# EAGLE board NU32 (EAGLE 5.12)
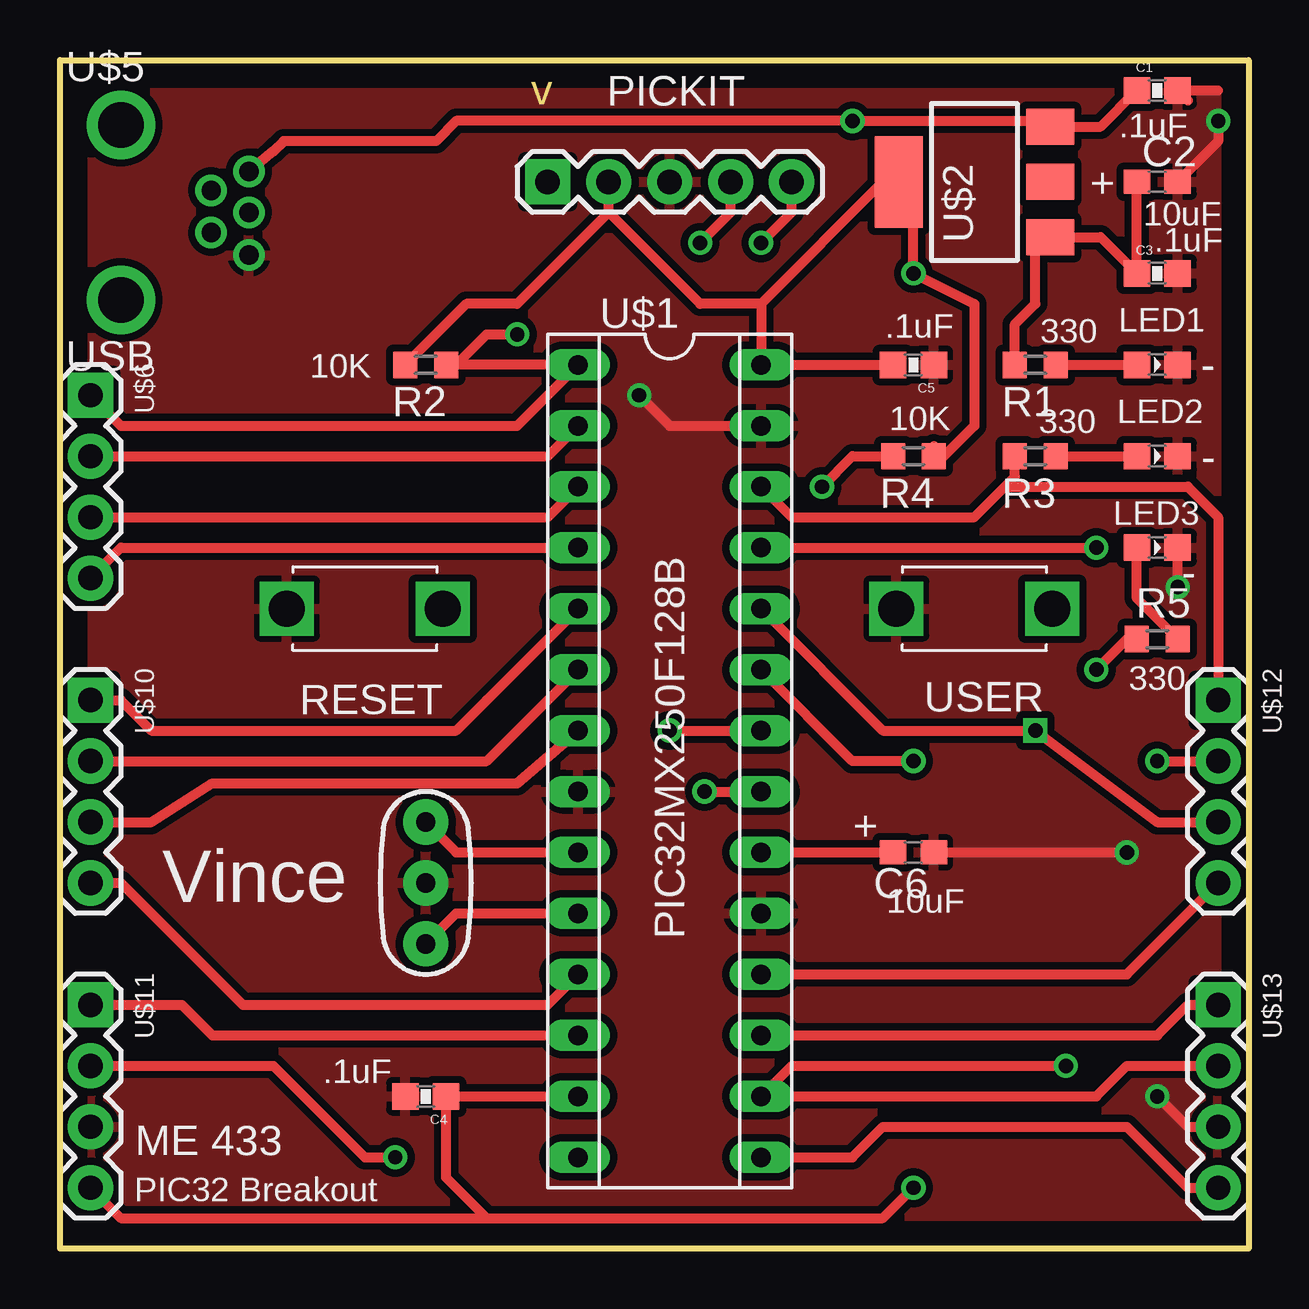
[diagram p0: board, top side]
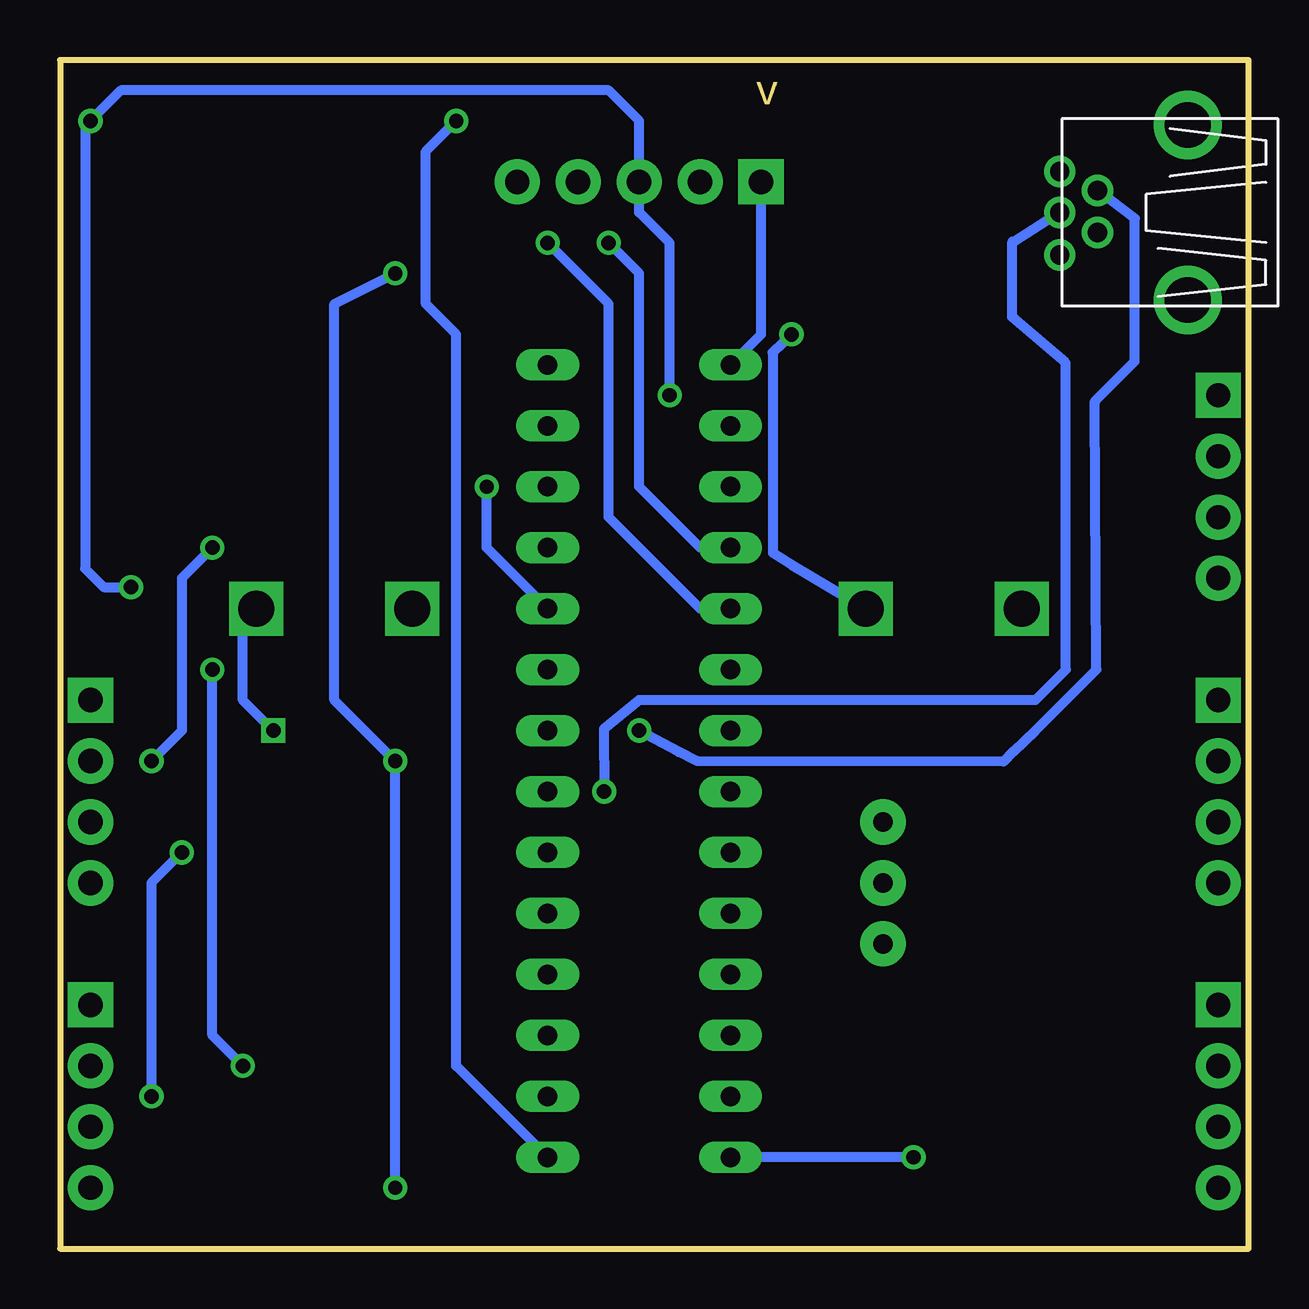
[diagram p1: board, bottom side, seen from below]

Size 49.53 x 49.53 mm. Coordinates in mm from the lower left corner, seen from the top.
Outline: 0,0 0,49.53 49.53,49.53 49.53,0 0,0
Copper layers (1*16): Top 0.035mm / dielectric 1.5mm / Bottom 0.035mm
Design rules "default": minimum track width 10mil, minimum drill 24mil, track to track 8mil, track to pad 8mil, pad to pad 8mil, via to via 8mil, smd to smd 8mil, copper to edge 40mil, drill to drill 8mil, minimum pad ring 10mil, minimum via ring 8mil, stop-mask expansion 4mil, vias tented up to drill 0mil, thermal gap 10mil

## Footprints (pad centres in the part's own frame; a part is rotated, then mirrored left to right if it is on the bottom)
0603 = smd 1.1 x 1.1: 1 -0.85,0; 2 0.85,0
C0603 = smd 1.1 x 1: 1 -0.85,0; 2 0.85,0
0603-DIODE = smd 1.1 x 1.1: AN -0.85,0; CAT 0.85,0
1X05 = drill 1.016 pad 1.88 square: 1 0,0 | drill 1.016 pad 1.88 round: 2 2.54,0; 3 5.08,0; 4 7.62,0; 5 10.16,0
R0603 = smd 1 x 1.1: 1 -0.85,0; 2 0.85,0
TACTILE_SWITCH = drill 1.5 square: 1 -3.25,0; 2 3.25,0
SOCKET-28-3 = drill 0.813 long: 1 -16.51,-3.81; 2 -13.97,-3.81; 3 -11.43,-3.81; 4 -8.89,-3.81; 5 -6.35,-3.81; 6 -3.81,-3.81; 7 -1.27,-3.81; 8 1.27,-3.81; 9 3.81,-3.81; 10 6.35,-3.81; 11 8.89,-3.81; 12 11.43,-3.81; 13 13.97,-3.81; 14 16.51,-3.81; 15 16.51,3.81; 16 13.97,3.81; 17 11.43,3.81; 18 8.89,3.81; 19 6.35,3.81; 20 3.81,3.81; 21 1.27,3.81; 22 -1.27,3.81; 23 -3.81,3.81; 24 -6.35,3.81; 25 -8.89,3.81; 26 -11.43,3.81; 27 -13.97,3.81; 28 -16.51,3.81
SOT223 = smd 1.5 x 2: 1 -2.3,-3.15; 2 0,-3.15; 3 2.3,-3.15 | smd 3.8 x 2: 4 0,3.15
USB-MINIB = drill 0.8 round: D+ 4.064,0; D- 2.489,0.914; GND 4.064,-1.778; ID 2.489,-0.838; VBUS 4.064,1.702 | drill 1.9 round: P$6 -1.27,-3.65; P$7 -1.27,3.65
1X04 = drill 1.016 pad 1.88 square: 1 0,0 | drill 1.016 pad 1.88 round: 2 2.54,0; 3 5.08,0; 4 7.62,0
RESONATOR-PTH = drill 0.8 pad 1.88 round: 1 -2.54,0; 2 0,0; 3 2.54,0

## Placement (x,y rotation side)
C1  .1uF  [0603]  45.72,48.26 0 top
C2  10uF  [C0603]  45.72,44.45 0 top
C3  .1uF  [0603]  45.72,40.64 0 top
C4  .1uF  [0603]  15.24,6.35 180 top
C5  .1uF  [0603]  35.56,36.83 180 top
C6  10uF  [C0603]  35.56,16.51 180 top
LED1  [0603-DIODE]  45.72,36.83 0 top
LED2  [0603-DIODE]  45.72,33.02 0 top
LED3  [0603-DIODE]  45.72,29.21 0 top
PICKIT  1X05_HEADER  [1X05]  20.32,44.45 0 top
R1  330  [R0603]  40.64,36.83 180 top
R2  10K  [R0603]  15.24,36.83 180 top
R3  330  [R0603]  40.64,33.02 180 top
R4  10K  [R0603]  35.56,33.02 180 top
R5  330  [R0603]  45.72,25.4 0 top
RESET  TACTILE_SWITCH  [TACTILE_SWITCH]  12.7,26.67 0 top
RESET1  TACTILE_SWITCH  [TACTILE_SWITCH]  38.1,26.67 0 top
U$1  PIC32MX250F128B  [SOCKET-28-3]  25.4,20.32 270 top
U$2  LD1117  [SOT223]  38.1,44.45 90 top
U$5  USB  [USB-MINIB]  3.81,43.18 0 top
U$6  1X04_HEADER  [1X04]  1.27,35.56 270 top
U$7  8MHZ-RESONATOR  [RESONATOR-PTH]  15.24,15.24 270 top
U$10  1X04_HEADER  [1X04]  1.27,22.86 270 top
U$11  1X04_HEADER  [1X04]  1.27,10.16 270 top
U$12  1X04_HEADER  [1X04]  48.26,22.86 270 top
U$13  1X04_HEADER  [1X04]  48.26,10.16 270 top

## Library data of the parts
C1-C6 LED1-LED3 R1-R5 RESET RESET1 U$1 U$2 U$5 U$7 = VMartinez433
PICKIT U$6 U$10-U$13 = ME433

## Nets
3.3V: C4.1 C5.2 PICKIT.2 R2.2 R4.1 U$1.13 U$1.23 U$1.28 U$2.4 U$11.4
5V: C1.1 U$1.15 U$2.3 U$5.VBUS U$13.4
A0: U$1.2 U$6.2
A1: U$1.3 U$6.3
A2: U$1.9 U$7.1
A3: U$1.10 U$7.3
A4: U$1.12 U$11.1
B0: PICKIT.4 U$1.4 U$6.4
B1: PICKIT.5 U$1.5 U$10.1
B2: U$1.6 U$10.2
B3: U$1.7 U$10.3
B4: U$1.11 U$10.4
B5: U$1.14 U$11.2
B7: R5.1 U$1.16 U$13.2
B8: U$1.17 U$13.1
B9: U$1.18 U$12.4
B10: U$1.21 U$5.D+
B11: U$1.22 U$5.D-
B13: R4.2 RESET1.2 U$1.24 U$12.3
B14: U$1.25 U$12.2
B15: LED2.AN R3.1
GND: C1.2 C2.2 C3.2 C4.2 C5.1 C6.1 LED1.CAT LED2.CAT LED3.CAT PICKIT.3 RESET1.1 RESET.1 U$1.8 U$1.19 U$1.27 U$5.GND U$7.2 U$11.3 U$13.3
MCLR: PICKIT.1 R2.1 RESET.2 U$1.1 U$6.1
N$1: C2.1 C3.1 R1.2 U$2.1
N$5: C6.2 U$1.20
S$1: LED3.AN R5.2
S$3: R3.2 U$1.26 U$12.1
S$4: LED1.AN R1.1

## Tracks (layer width: path | path; a pad name or v marks a point on that pad's centre or on a via)
3.3V  (via drill 0.6)
  Top 0.406: 29.21,39.37 U$1.28 C5.2 | 29.21,39.37 34.29,44.45 U$2.4 35.56,43.84 v35.56,40.64 38.1,39.37 38.1,34.29 36.83,33.02 R4.1 36.41,33.44 | v35.56,2.54 34.29,1.27 17.78,1.27 | U$1.13 C4.1 16.09,2.96 17.78,1.27 | 29.21,39.37 26.67,39.37 22.86,43.18 | 22.86,43.18 PICKIT.2 | 22.86,43.18 19.05,39.37 16.93,39.37 R2.2 | U$11.4 2.54,1.27 17.78,1.27 | U$1.23 33.02,20.32 v35.56,20.32
  Bottom 0.406: v35.56,40.64 38.1,39.37 38.1,22.86 v35.56,20.32 v35.56,2.54
5V  (via drill 0.6)
  Top 0.406: U$5.VBUS 8.89,45.72 9.32,46.15 15.67,46.15 16.51,46.99 v33.02,46.99 41.01,46.99 U$2.3 43.36,46.75 C1.1 | U$13.4 46.99,2.54 44.45,5.08 34.29,5.08 33.02,3.81 U$1.15
  Bottom 0.406: v33.02,46.99 34.29,45.72 34.29,39.37 33.02,38.1 33.02,7.62 U$1.15
A0
  Top 0.406: U$6.2 20.32,33.02 U$1.2
A1
  Top 0.406: U$6.3 20.32,30.48 U$1.3
A2
  Top 0.406: U$7.1 16.51,16.51 U$1.9
A3
  Top 0.406: U$7.3 16.51,13.97 U$1.10
A4
  Top 0.406: U$11.1 5.08,10.16 6.35,8.89 U$1.12
B0  (via drill 0.6)
  Top 0.406: PICKIT.4 27.94,43.18 v26.67,41.91 | U$6.4 2.54,29.21 U$1.4
  Bottom 0.406: v26.67,41.91 25.4,40.64 25.4,31.75 22.86,29.21 U$1.4
B1  (via drill 0.6)
  Top 0.406: PICKIT.5 30.48,43.18 v29.21,41.91 | U$10.1 2.54,22.86 3.81,21.59 16.51,21.59 17.78,22.86 U$1.5
  Bottom 0.406: v29.21,41.91 26.67,39.37 26.67,30.48 22.86,26.67 U$1.5
B2
  Top 0.406: U$10.2 17.78,20.32 U$1.6
B3
  Top 0.406: U$10.3 3.81,17.78 6.35,19.39 19.05,19.39 U$1.7
B4
  Top 0.406: U$10.4 2.54,15.24 7.62,10.16 20.32,10.16 U$1.11
B5  (via drill 0.6)
  Top 0.406: U$11.2 8.89,7.62 12.7,3.81 v13.97,3.81
  Bottom 0.406: v13.97,3.81 U$1.14
B7  (via drill 0.6)
  Top 0.406: v41.91,7.62 30.48,7.62 U$1.16 43.18,6.35 44.45,7.62 U$13.2 | v43.18,24.13 44.45,25.4 R5.1
  Bottom 0.406: v41.91,7.62 43.18,8.89 v43.18,24.13
B8
  Top 0.406: U$13.1 46.99,10.16 45.72,8.89 U$1.17
B9
  Top 0.406: U$12.4 44.45,11.43 U$1.18
B10  (via drill 0.6)
  Top 0.406: v26.86,19.05 U$1.21
  Bottom 0.406: v26.86,19.05 26.86,21.65 25.4,22.86 8.89,22.86 7.62,24.13 7.63,36.91 9.86,38.81 9.85,38.8 9.85,41.96 9.8,41.96 U$5.D+
B11  (via drill 0.6)
  Top 0.406: v25.4,21.59 U$1.22
  Bottom 0.406: v25.4,21.59 23.76,20.7 22.97,20.32 10.21,20.3 9.81,20.72 8.89,21.59 6.35,24.13 6.41,35.26 6.41,35.3 4.76,36.98 4.76,42.93 4.74,42.93 U$5.D-
B13  (via drill 0.6)
  Top 0.406: R4.2 33.02,33.02 v31.75,31.75 | U$12.3 45.72,17.78 v40.64,21.59 34.29,21.59 U$1.24
  Bottom 0.406: v31.75,31.75 31.75,29.21 U$1.24 | v40.64,21.59 41.91,22.86 41.91,26.11 RESET1.2
B14  (via drill 0.6)
  Top 0.406: v45.72,20.32 U$12.2 | U$1.25 v43.18,29.21
  Bottom 0.406: v45.72,20.32 44.45,21.59 44.45,27.94 v43.18,29.21
B15
  Top 0.406: R3.1 LED2.AN
GND  (via drill 0.6)
  Top 0.406: U$13.3 46.99,5.08 v45.72,6.35 | C6.1 v44.45,16.51 | C2.2 48.26,46.14 v48.26,46.99 | U$1.27 25.4,34.29 v24.13,35.56 | 48.26,48.26 C1.2 46.99,47.84 | LED3.CAT v46.57,27.57
  Bottom 0.406: v45.72,6.35 45.72,15.24 v44.45,16.51 | v24.13,35.56 24.13,41.91 25.4,43.18 PICKIT.3 25.4,46.99 26.67,48.26 46.99,48.26 v48.26,46.99 48.48,46.77 48.48,28.34 47.71,27.57 v46.57,27.57
  pour Top (isolate 0.305): -6.35,53.34 55.88,53.34 55.88,-6.35 -6.35,-6.35
MCLR  (via drill 0.6)
  Top 0.406: v19.05,38.1 17.78,38.1 16.51,36.83 R2.1 U$1.1 19.05,34.29 2.54,34.29 U$6.1
  Bottom 0.406: PICKIT.1 20.32,38.1 U$1.1 | v19.05,38.1 19.84,37.35 19.82,28.99 19.05,28.5 RESET.2
N$1
  Top 0.406: C2.1 C3.1 43.36,42.15 U$2.1 40.64,41.54 40.64,39.37 39.79,38.52 R1.2
N$5
  Top 0.406: U$1.20 C6.2
S$1
  Top 0.406: R5.2 44.87,27.1 LED3.AN
S$3
  Top 0.406: U$1.26 30.48,30.48 38.1,30.48 39.37,31.75 | 39.37,31.75 39.79,32.17 R3.2 | U$12.1 48.26,30.48 46.99,31.75 39.37,31.75
S$4
  Top 0.406: R1.1 LED1.AN

## Text on the board
Dimension: v
tPlace: + | - | - | - | RESET | USER | + | Vince | ME 433 | PIC32 Breakout